# Altium PCB NUC977 DEV BOARD.PcbDoc (part 4 of 5)
Units mil, origin at the board's own origin, x right, y up, seen from the top; angles counter-clockwise.
Board outline 9012.5 x 7677.17 mil, 4 copper layers (Top, 2-GND, 3-POWER, Bottom), stack 35.4 mil thick; 487 components, 451 nets, 1969 pads, 1529 vias.
Unrouted connection lines stored in the file: 1.
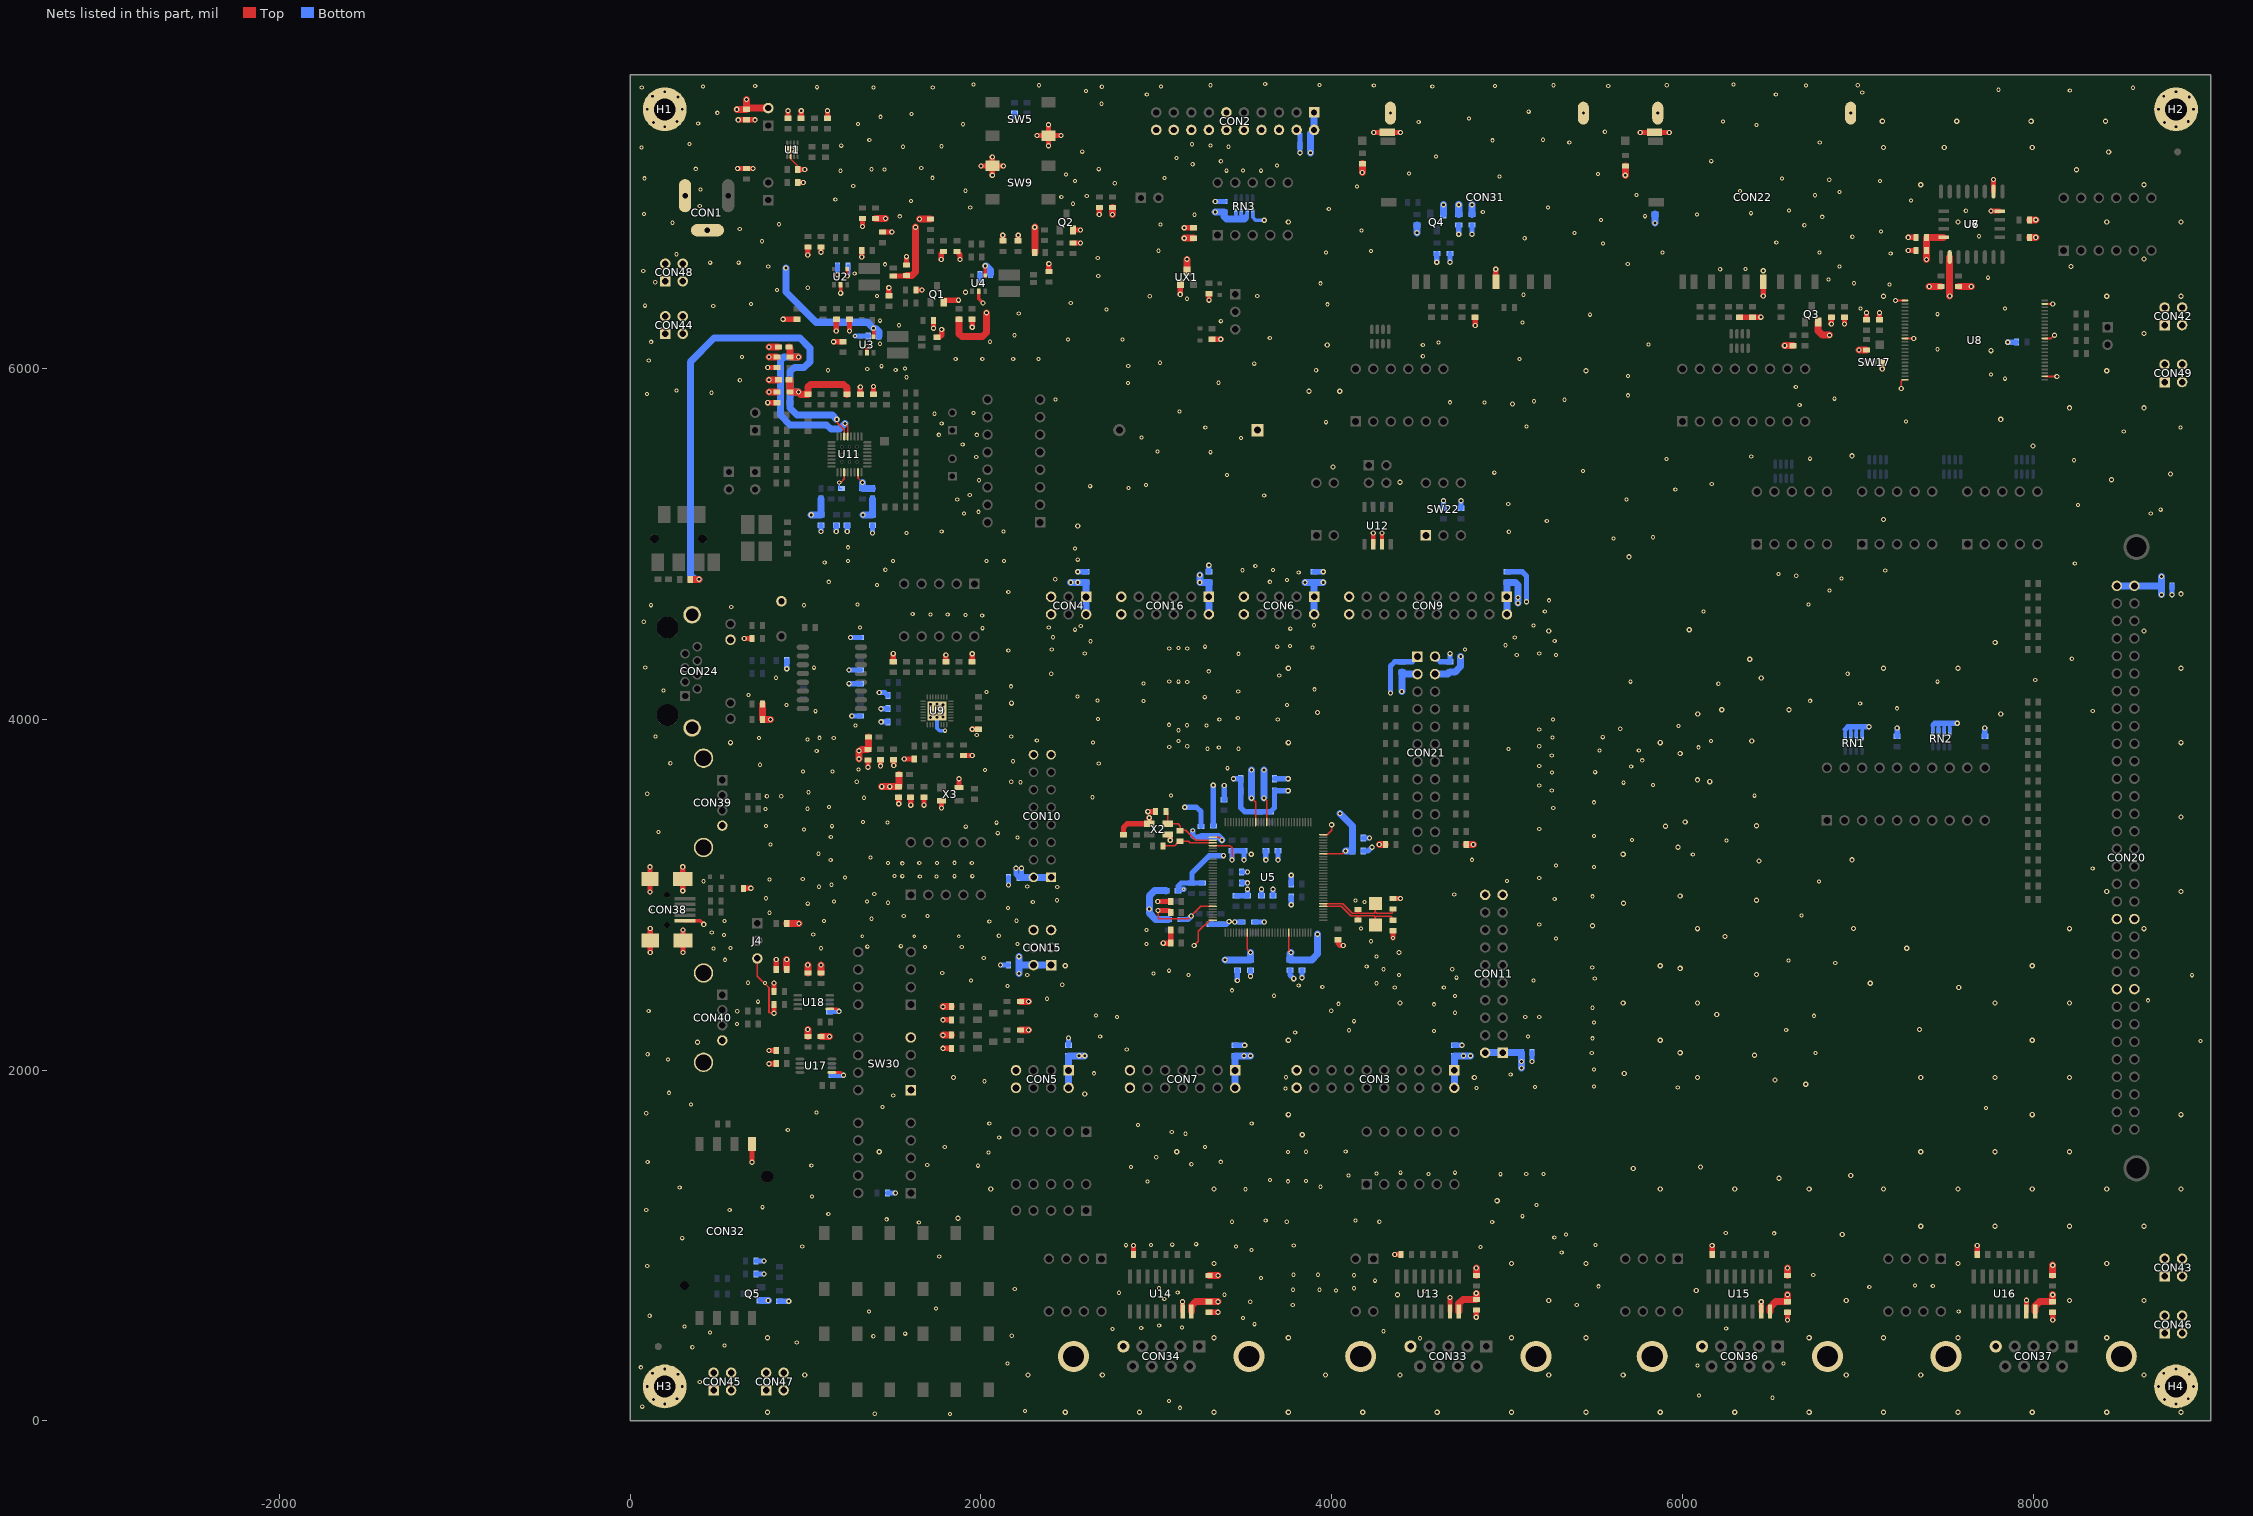
[diagram p6: the nets of this part, all layers, seen from the top]

## Via types
v1: diameter 24, hole 12, Top to Bottom, 897 vias
v2: diameter 30, hole 16, Top to Bottom, 628 vias
v3: diameter 20, hole 10, Top to Bottom, 4 vias

## Nets (pads, with @x,y where several pads share a name; then routed paths per layer and width w, separated by ;. In a path a pad name is that pad's centre, name@x,y a point inside that pad or via, vN(x,y) a via of type N, cw(c..) or ccw(c..) an arc to the next point about the centre after c; other vN are vias at no path point) (continued)
VD33: C42.2 C43.1 C47.2 C48.1 C52.2 C53.1 C57.2 C58.1 CB8.1 CB9.1 CB10.1 CB11.1 CB12.1 CB13.1 CB25.1 CB31.2 CB32.2 CON2.1 CON2.2 CON3.1 CON3.2 CON4.1 CON4.2 CON5.1 CON5.2 CON6.1 CON6.2 CON7.1 CON7.2 CON9.1 CON9.2 CON10.1 CON10.2 CON11.1 CON11.2 CON15.1 CON15.2 CON16.1 CON16.2 CON20.1 CON20.2 CON21.3 CON21.4 CON42.1 CON42.2 CON42.3 CON42.4 CON43.1 CON43.2 CON43.3 CON43.4 CON44.1 CON44.2 CON44.3 CON44.4 CON45.1 CON45.2 CON45.3 CON45.4 CT6.1 CT18.2 CT19.2 CT20.1 CT21.1 CT22.1 CT23.1 CT24.1 CT25.1 CT45.2 CT46.2 CT47.2 CT48.2 CT49.2 CT50.2 CT51.2 CT52.2 CT53.2 CT56.2 CT60.2 CT62.2 CT63.2 CT64.1 CT67.1 CT69.1 CT74.2 CT76.2 CT78.2 CT82.2 CT90.2 L6.1 L7.1 L8.2 L9.2 L12.2 L14.2 Q3.S Q4.S Q5.S R6.2 R7.2 R8.2 R21.1 R28.1 R33.2 R34.2 R38.2 R39.2 R40.2 R41.1 R43.2 R46.2 R63.1 R69.1 R98.2 R109.2 R110.2 R115.2 R116.2 R117.2 R118.2 R119.1 R120.1 R121.2 R124.2 R129.2 R130.2 R131.2 RN3.1 RN3.3 RN3.5 RV1.1 SW1.2 U5.9 U5.24 U5.57 U5.81 U5.85 U5.98 U6.8 U7.2 U12.3 U13.16 U14.16 U15.16 U16.16 | length 11454.4
  Top w8: U5.98@3322.54,3328.35 3359.15,3328.35 v2(3375,3312.5) ; U5.9@3519.39,2785.04 3519.39,2690.11 v2(3537.5,2672) ; v2(3542.5,3552) 3566.63,3527.87 U5.85@3566.63,3414.96 ; v2(3613.75,3552) 3629.63,3536.12 U5.81@3629.63,3414.96 ; U5.24@3755.61,2785.04 3755.61,2684.39 v2(3768,2672) ; U5.57@3952.46,3233.86 4063.86,3233.86 v2(4080,3250)
  Top w25: U12.3@4287.5,5000 v2(4287.5,5064)
  Top w30: SW1.2@1500,6530 1572.5,6530 CT6.1@1575,6532.5
  Top w40: R63.1@755,4087.5 R69.1@755,4000 v2(800,4000) ; v2(792,5867.5) CT76.2@837.5,5867.5 ; v2(792,5937.5) L9.2@845,5937.5 ; v2(792,6067.5) CT90.2@837.5,6067.5 ; v2(792,6125) L14.2@845,6125 ; CT82.2@892.5,2575 v2(892.5,2632) ; R131.2@892.5,2837.5 v2(962.5,2837.5) ; R129.2@1012.5,2192.5 v2(1012.5,2232) ; R130.2@1012.5,2555 v2(1012.5,2600) ; R110.2@1087.5,2192.5 v2(1136,2192.5) ; R109.2@1087.5,2555 v2(1087.5,2600) ; v2(1304,3776) v2@1304,3816 ; v2(1304,3822) v2@1304,3816 ; L7.1@1360,3901 1360,3833.75 CT69.1@1356.25,3830 1318,3830 v2@1304,3816 ; R8.2@1400,6857.5 v2(1456,6857.5) ; v2(1434,3617.5) v2(1480,3617.5) CT67.1@1531.25,3617.5 1532,3618.25 L6.1@1532,3687 ; CT6.1@1575,6532.5 1608,6532.5 1627.5,6552 v2(1627.5,6808) ; v2(1650,6855) R6.2@1712.5,6855 ; v2(1784,2200) R116.2@1832.5,2200 ; v2(1784,2362.5) R118.2@1832.5,2362.5 ; R21.1@1875,6282.5 1875,6200 1891,6184 2008,6184 2032,6208 v2(2032,6320) ; R115.2@2225,2230 v2(2272,2230) ; R117.2@2225,2392.5 v2(2272,2392.5) ; R7.2@2307.5,6662.5 v2(2307.5,6808) ; v2(2750,6880) R28.1@2750,6920 ; U14.16@3200,625 3200,656 3224,680 C48.1@3300,680 v2(3352,680) ; C47.2@3300,830 v2(3352,830) ; v2(4175,7120) R124.2@4175,7170 ; v2(4272,3287.5) R119.1@4307.5,3287.5 ; U13.16@4725,625 4725,669 4748.5,692.5 C43.1@4825,692.5 v2(4825,728) ; R120.1@4767.5,3287.5 v2(4808,3287.5) ; C42.2@4825,830 v2(4825,872) ; v2(5675,7104) R121.2@5675,7157.5 ; U15.16@6500,625 6500,648 6532,680 C53.1@6600,680 v2(6600,720) ; v2(6584,6132.5) R43.2@6631.25,6132.5 ; C52.2@6600,830 v2(6600,872) ; Q3.S@6774.9,6267.22 6774.9,6216 6798.9,6192 v2(6840,6192) ; v2(7008,6107.5) RV1.1@7050,6107.5 ; v2(7392.5,6624) CT64.1@7392.5,6675 CB25.1@7392.5,6750 U6.8@7490.5,6750 ; v2(7408,6470) R40.2@7475,6470 ; v2(7525,6416) U7.2@7525,6637.5 ; R41.1@7575,6470 v2(7648,6470) ; R39.2@7980,6750 v2(8016,6750) ; R38.2@7980,6850 v2(8016,6850) ; U16.16@8012.5,625 8012.5,656 8036.5,680 C58.1@8112.5,680 v2(8112.5,720) ; C57.2@8112.5,830 v2(8112.5,888)
  Bottom w20: 3454,6856 RN3.1@3454,6887.5 ; 3486,6856 RN3.3@3486,6887.5 ; 3510,6864 3518,6872 RN3.5@3518,6887.5
  Bottom w30: v2(2200,3152) 2200,3117.5 CT50.2@2217.5,3100 2232,3100 v2(2232,3152) ; v1(3208,3368) 3208,3338 3216,3330 CT25.1@3255,3330
  Bottom w40: Q5.S@745.28,687.6 v2(787.5,687.6) ; v2(1032,5167.5) CT74.2@1087.5,5167.5 L8.2@1087.5,5257.5 ; v2(1328,5167.5) CT78.2@1381.25,5167.5 L12.2@1381.25,5257.5 ; v2(2217.5,2552) CT52.2@2217.5,2600 ; v2(2217.5,2648) CT52.2@2217.5,2600 ; CT50.2@2232,3100 CON10.2@2300,3100 CON10.1@2400,3100 ; CON15.1@2400,2600 CON15.2@2300,2600 CT52.2@2217.5,2600 ; CON5.2@2500,1900 CON5.1@2500,2000 CT47.2@2500,2082.5 v2(2560,2082.5) v2(2592,2082.5) ; v2(2512,4782.5) v2(2552,4782.5) CT46.2@2600,4782.5 CON4.1@2600,4700 CON4.2@2600,4600 ; R33.2@3056.25,3023.75 3051.07,3023.87 2989.87,3023.87 2960,2993 v2(2960,2920) 2960,2896 2996,2860 R34.2@3070,2860 ; v2(3248,4824) v2(3248,4782.5) CT53.2@3300,4782.5 CON16.1@3300,4700 CON16.2@3300,4600 ; CT25.1@3255,3330 3257.5,3332.5 CB13.1@3325,3332.5 3355,3332.5 v2(3375,3312.5) ; v2(3336,6895) CT18.2@3387.5,6895 3387.5,6868.5 3400,6856 3454,6856 3486,6856 3502,6856 3510,6864 ; v2(3392,2630) CT20.1@3462.5,2630 CB8.1@3537.5,2630 v2(3537.5,2672) ; CON7.2@3450,1900 CON7.1@3450,2000 CT56.2@3450,2082.5 v2(3500,2082.5) v2(3537.5,2082.5) ; v2(3542.5,3552) CB12.1@3542.5,3593.75 CT24.1@3542.5,3662.5 v2(3542.5,3712) ; v2(3613.75,3552) CB11.1@3613.75,3593.75 CT23.1@3613.75,3662.5 v2(3613.75,3712) ; v2(3768,2672) 3762.5,2666.5 CB9.1@3762.5,2630 CT21.1@3831.25,2630 3888,2630 3920,2662 v2(3920,2776) ; v2(3848,4782.5) CT48.2@3900,4782.5 ; v2(3880,7232) CT19.2@3880,7275 3880,7342.5 CON2.2@3900,7362.5 CON2.1@3900,7462.5 ; CON6.2@3900,4600 CON6.1@3900,4700 CT48.2@3900,4782.5 ; v2(3952,4782.5) CT48.2@3900,4782.5 ; v2(4048,3464) 4120,3392 CT22.1@4120,3325 CB10.1@4120,3250 v2(4080,3250) ; v2(4400,4160) CT62.2@4400,4270 4410.45,4259.55 CON21.3@4489.57,4259.55 ; v2(4487.5,6776) R98.2@4487.5,6820 ; CON21.4@4589.57,4259.55 4664.55,4259.55 CT63.2@4675,4270 4704,4270 4736,4302 v2(4736,4360) ; Q4.S@4637.4,6882.78 v2(4637.4,6936) ; CON3.2@4700,1900 CON3.1@4700,2000 CT45.2@4700,2082.5 v2(4752,2082.5) v2(4792,2082.5) ; CB31.2@4725,6880 v2(4725,6936) ; CB32.2@4800,6880 v2(4800,6936) ; CON11.2@4875,2100 CON11.1@4975,2100 CT51.2@5082.5,2100 v2(5082.5,2050) v2(5082.5,2012.5) ; CON9.2@5000,4600 CON9.1@5000,4700 CT49.2@5000,4782.5 5048,4782.5 5062.5,4768 v2(5062.5,4696) v2(5062.5,4664) ; v2(5843.75,6832) R46.2@5843.75,6882.5 ; CON20.1@8478.15,4762.6 CON20.2@8578.15,4762.6 8732.4,4762.6 CT60.2@8732.5,4762.5 ; v2(8732.5,4712) CT60.2@8732.5,4762.5 ; v2(8732.5,4816) CT60.2@8732.5,4762.5
VDDA: CT77.2 L12.1 U11.31 | length 159.6
  Top w10: U11.31@1299.21,5410.14 1299.21,5377.79 v2(1325,5352)
  Bottom w40: v2(1325,5352) CT77.2@1325,5317.5 L12.1@1381.25,5317.5
VDDB: CT75.2 L9.1 R91.2 RX3.1 RX4.1 U11.14 | length 3459.6
  Top w8: v2(1177.47,5712) 1177.47,5694.53 1220.47,5651.53 U11.14@1220.47,5614.86
  Top w40: R91.2@342.5,4800 v2(392,4800) ; L9.1@905,5937.5 912.5,5937.5 CT75.2@912.5,5867.5 v2(960,5867.5) 972.5,5855 RX3.1@1012.5,5855 1012.5,5896 1028.5,5912 1216,5912 1237.5,5890.5 RX4.1@1237.5,5855
  Bottom w40: v2(392,4800) 368,4800 342.5,4825.5 342.5,6040 478.5,6176 968,6176 1024,6120 1024,6040 992,6008 936,6008 912,5984 912,5887 931.5,5867.5 ; v2(960,5867.5) 931.5,5867.5 ; v2(1177.47,5712) 1153.47,5736 952,5736 912,5776 912,5848 931.5,5867.5
VDDC: CT79.2 L14.1 U11.13 | length 1026.5
  Top w8: v2(1224.16,5688) 1240.16,5672 U11.13@1240.16,5614.86
  Top w40: L14.1@905,6125 912,6118 912,6068 CT79.2@912.5,6067.5 v2(960,6067.5)
  Bottom w40: v2(960,6067.5) 875.5,6067.5 856,6048 856,5736 912,5680 1120,5680 1144,5656 1192.16,5656 v2(1224.16,5688)
VIN: C64.1 CT1.1 CT5.1 CT9.1 CT13.1 J2.2 U2.4 U3.4 U4.4 UX1.3 | length 1420.5
  Top w20: v2(1237.4,6529) U2.4@1237.4,6570.03 ; U3.4@1387.4,6182.53 1387.5,6182.53 v2(1387.5,6231.25) ; U4.4@2024.9,6532.53 2025,6532.53 v2(2025,6587.5)
  Top w40: v2(608,7480) CT1.1@662.5,7480 ; v2(662.5,7536) CT1.1@662.5,7480 ; J2.2@787.5,7487.5 667.5,7487.5 CT1.1@662.5,7480 ; v2(3160,6745) C64.1@3212.5,6745 ; UX1.3@3175,6557.5 v2(3175,6625)
  Bottom w20: v2(1237.4,6529) 1246,6537.6 1246,6584 CT13.1@1242.5,6587.5
  Bottom w40: v2(887.5,6575) 887.5,6437.5 1059.1,6265.9 1352.85,6265.9 v2(1387.5,6231.25) 1400,6231.25 1417.5,6213.75 CT9.1@1417.5,6187.5 ; v2(2025,6587.5) 2031.25,6587.5 2055,6563.75 CT5.1@2055,6537.5
VREF: C28.2 U11.27 | length 123.4
  Top w8: v1(1192,5352) 1200,5352 1220.47,5372.47 U11.27@1220.47,5410.14
  Bottom w8: v1(1192,5352) 1192,5317.5 C28.2@1206.25,5317.5
VS: BT1.1 C1.2 C2.2 C3.2 C4.2 C5.2 C7.2 C8.1 C10.2 C11.2 C12.2 C13.2 C15.2 C16.1 C17.2 C18.2 C19.2 C20.2 C21.2 C22.2 C23.2 C24.2 C25.2 C26.2 C41.2 C43.2 C46.1 C48.2 C51.1 C53.2 C56.1 C58.2 C61.1 C64.2 CB1.2 CB2.2 CB3.2 CB4.2 CB5.2 CB6.2 CB7.2 CB8.2 CB9.2 CB10.2 CB11.2 CB12.2 CB13.2 CB16.2 CB17.2 CB18.2 CB19.2 CB20.2 CB21.2 CB25.2 CB26.2 CB27.2 CB28.1 CB29.1 CB31.1 CB32.1 CB33.1 CB34.1 CM1.2 CM4.2 CON1.2 CON1.3 CON2.4 CON2.6 CON2.8 CON2.10 CON2.11 CON2.12 CON2.14 CON2.16 CON2.18 CON2.20 CON3.19 CON3.20 CON4.5 CON4.6 CON5.7 CON5.8 CON6.9 CON6.10 CON7.13 CON7.14 CON9.19 CON9.20 CON10.15 CON10.16 CON11.19 CON11.20 CON15.5 CON15.6 CON16.11 CON16.12 CON20.39 CON20.40 CON20.47 CON20.48 CON21.1 CON21.2 CON22.3 CON22.12 CON22.13 CON22.14 CON24.11 CON24.13 CON24.14 CON31.3 CON31.12 CON31.13 CON31.14 CON32.5 CON33.5 CON33.10 CON33.11 CON34.5 CON34.10 CON34.11 CON36.5 CON36.10 CON36.11 CON37.5 CON37.10 CON37.11 CON38.5 CON38.6 CON38.7 CON38.8 CON38.9 CON39.4 CON39.5 CON39.6 CON40.4 CON40.5 CON40.6 CON46.1 CON46.2 CON46.3 CON46.4 CON47.1 CON47.2 CON47.3 CON47.4 CON48.1 CON48.2 CON48.3 CON48.4 CON49.1 CON49.2 CON49.3 CON49.4 CT1.2 CT2.1 CT3.2 CT4.2 CT5.2 CT6.2 CT7.2 CT8.2 CT9.2 CT10.2 CT11.2 CT12.2 CT13.2 CT14.2 CT15.2 CT16.2 CT18.1 CT19.1 CT20.2 CT21.2 CT22.2 CT23.2 CT24.2 CT25.2 CT30.2 CT31.2 CT32.2 CT33.2 CT34.2 CT35.2 CT37.2 CT38.2 CT40.2 CT41.2 CT43.2 CT44.2 CT45.1 CT46.1 CT47.1 CT48.1 CT49.1 CT50.1 CT51.1 CT52.1 CT53.1 CT56.1 CT60.1 CT62.1 CT63.1 CT64.2 CT65.1 CT66.1 CT67.2 CT68.2 CT69.2 CT70.2 CT71.2 CT74.1 CT76.1 CT78.1 CT80.1 CT81.1 CT82.1 CT83.1 CT84.1 CT85.1 CT86.1 CT87.1 CT88.1 CT89.1 CT90.1 CX1.2 H1.1 H1.2 H1.3 H1.4 H1.5 H1.6 H1.7 H1.8 H1.9 H2.1 H2.2 H2.3 H2.4 H2.5 H2.6 H2.7 H2.8 H2.9 H3.1 H3.2 H3.3 H3.4 H3.5 H3.6 H3.7 H3.8 H3.9 H4.1 H4.2 H4.3 H4.4 H4.5 H4.6 H4.7 H4.8 H4.9 J4.3 LED2.2 LED9.2 LED10.2 Q1.E Q2.E R1.1 R2.1 R5.2 R16.1 R19.1 R23.1 R24.2 R25.2 R26.2 R27.2 R42.1 R53.1 R56.1 R58.1 R60.1 R62.1 R71.2 R87.2 R89.2 R92.2 R94.2 R95.1 R96.1 R97.1 R108.2 R113.1 RG1.1 RN1.2 RN1.4 RN1.6 RN1.8 RN2.2 RN2.4 RN2.6 RN2.8 RN3.7 SW5.4 SW9.4 SW17.3 SW22.1 SW30.1 SW30.4 U1.2 U1.9 U2.2 U3.2 U4.2 U5.64 U5.101 U5.123 U5.128 U6.4 U7.10 U8.2 U8.13 U8.23 U8.25 U8.36 U8.48 U9.33 U12.2 U13.15 U14.15 U15.15 U16.15 U17.1 U18.1 UX1.1 X2.2 X2.4 X3.2 X3.4 | length 15711.7
  Top w5: v2(1749.5,4049.5) 1749.5,4047.25 U9.33@1792.75,4004
  Top w8: v2(3010,2911) 3010,2864 3184,2864 v2(3200,2880) 3254.65,2934.65 U5.123@3322.54,2934.65 ; v2(3216,2712) 3240,2736 3240,2792 3303.91,2855.91 U5.128@3322.54,2855.91 ; U5.101@3322.54,3281.1 3419.5,3281.1 3432,3268.6 v2(3432,3200) ; U5.64@3952.46,3344.09 3976.09,3344.09 4000,3368 v2(4000,3400)
  Top w10: J4.3@725,2637.5 725,2536 792,2469 792,2328 v2@820,2328 ; U1.9@915.16,7240.16 U1.2@915.16,7210.63 915.16,7196.84 955,7157 CT2.1@955,7137.5 ; v2(7216,6390.26) U8.25@7269.88,6390.26 ; v2(7248,5888) 7248,5929.5 7256,5937.5 U8.48@7269.88,5937.5 ; U8.36@7269.88,6173.72 v2(7320,6173.72) ; U8.2@8067.13,5957.18 v2(8136,5957.18) ; U8.13@8067.13,6173.72 8104,6173.72 v2(8122.28,6192) ; U8.23@8067.13,6370.57 v2(8112.5,6370.57)
  Top w12: U1.9@915.16,7240.16 v1(925,7250)
  Top w15: U18.1@1137.5,2350 1176,2350 v2(1190,2336) ; U17.1@1150,1987.5 1200,1987.5 v2(1216,1971.5)
  Top w20: CON38.5@312.2,2851.81 400,2851.81 v2(419.81,2832) ; v2(1200,6432) U2.2@1200,6479.97 ; U3.2@1350,6092.47 v2(1350,6128) ; U4.2@1987.5,6442.47 1987.5,6400 v2(2012.5,6375)
  Top w25: U12.2@4237.5,5000 v2(4237.5,5064)
  Top w30: v2(113.39,3016) CON38.8@113.39,3090 v2(113.39,3160) ; v2(114.17,2672) CON38.6@114.17,2739.61 v2(114.17,2808) ; v2(300,3024) CON38.9@300,3090 v2(300,3160) ; v2(300.39,2672) CON38.7@300.39,2740 v2(300.39,2800) ; v2(612.5,7142.5) C1.2@662.5,7142.5 v2(700,7142.5) ; v2(616,7420) CT1.2@662.5,7420 v2(712,7420) ; R113.1@645.5,3037.5 v2(688,3037.5) ; v2(650,4462.5) R71.2@695,4462.5 ; v2(695,1475.5) CON32.5@695,1579.5 ; v2(784,5807.5) CT76.1@837.5,5807.5 ; v2(784,6007.5) CT90.1@837.5,6007.5 ; v2(792,2037.5) CT85.1@832.5,2037.5 ; v2(792,2112.5) CT87.1@832.5,2112.5 ; v2(820,2325) 820,2328 CT86.1@820,2375 ; CT88.1@820,2450 v2(820,2497.5) ; CT82.1@832.5,2575 v2(832.5,2632) ; v2(872,6282.5) C7.2@950,6282.5 ; CB1.2@900,7430 v2(900,7472) ; R2.1@955,7062.5 v2(987,7062.5) ; CT2.1@955,7137.5 v2(995,7137.5) ; R1.1@975,7430 v2(975,7472) ; v2(1012.5,6649) R16.1@1012.5,6695 ; v2(1087.5,6665) C8.1@1087.5,6695 ; R5.2@1125,7430 v2(1125,7472) ; v2(1160,6155) C10.2@1212.5,6155 ; v2(1175,6216) C11.2@1175,6282.5 ; v2(1250,6216) R19.1@1250,6282.5 ; R89.2@1312.5,5855 v2(1312.5,5896) ; v2(1320,6637.5) CT7.2@1320,6675 ; v2(1325,6812.5) LED2.2@1325,6857.5 ; v2(1356.25,3728) CT69.2@1356.25,3770 ; R87.2@1387.5,5855 v2(1387.5,5900) ; v2(1427.5,3736) CB28.1@1427.5,3771 ; CT8.2@1437.5,6780 v2(1492,6780) ; CT10.2@1475,6417.5 v2(1475,6462.5) ; R56.1@1500,4330 v2(1500,4376) ; v2(1502.5,3737.5) CT70.2@1502.5,3771 ; v2(1531.25,3520) CT67.2@1531.25,3557.5 ; v2(1562.5,3775) C24.2@1620,3775 ; CT6.2@1575,6592.5 v2(1575,6640) ; CT68.2@1599.5,3557 1600,3557 v2(1600,3512) ; CT3.2@1630,6450 v2(1664,6450) ; C23.2@1674.5,3557 1675,3557 v2(1675,3512) ; v2(1730,6232) CT12.2@1730,6275 ; CT11.2@1750,6180 1763.5,6180 1776,6192.5 v2(1776,6225) ; v2(1773.5,6624) 1773.5,6656 C15.2@1787.5,6670 ; v2(1775,3496) X3.2@1775,3537.7 ; v2(1784,2125) LED9.2@1832.5,2125 ; v2(1784,2287.5) LED10.2@1832.5,2287.5 ; Q1.E@1787.4,6379.72 1787.4,6392 v2(1872,6392) ; R60.1@1800,4330 v2(1800,4368) ; R23.1@1862.5,6670 1880,6652.5 v2(1880,6624) ; X3.4@1875,3612.5 v2(1875,3662.5) ; R58.1@1900,3795 v2(1950,3795) ; v2(1950,3945) C18.2@1987.5,3945 ; R62.1@1950,4330 v2(1950,4375) ; v2(1950,6237.5) C13.2@1950,6282.5 ; v2(2000,7157.19) SW9.4@2065.16,7157.19 ; v2(2065.16,7104) SW9.4@2065.16,7157.19 ; v2(2065.16,7208) SW9.4@2065.16,7157.19 ; CT14.2@2125,6730 v2(2125,6762.5) ; v2(2128,7157.19) SW9.4@2065.16,7157.19 ; CT16.2@2212.5,6730 v2(2212.5,6762.5) ; v2(2320,7330.31) SW5.4@2384.84,7330.31 ; v2(2384.84,7272) SW5.4@2384.84,7330.31 ; v2(2384.84,7392) SW5.4@2384.84,7330.31 ; CT15.2@2387.5,6555 v2(2387.5,6600) ; v2(2456,7330.31) SW5.4@2384.84,7330.31 ; Q2.E@2524.9,6792.22 v2(2568,6792.22) ; CT4.2@2525,6717.5 v2(2568,6717.5) ; v2(2675,6880) C16.1@2675,6920 ; C5.2@2812.5,3342.5 2812.5,3384 2834.01,3405.51 X2.2@2960.33,3405.51 v2(2960.33,3440) ; C51.1@2870,950 v2(2870,1000) ; v2(2952,3475) C4.2@2995,3475 ; v2(3008,2962) 3082.5,2962 CB3.2@3082.5,2962.5 ; v2(3010,2911) 3072,2911 R24.2@3082.5,2900 ; v2(3040,2725) R25.2@3082.5,2725 CB4.2@3082.5,2800 ; X2.4@3064.67,3344.49 3080,3329.14 v2(3080,3312) ; v2(3137,6425) UX1.1@3137,6487.5 ; U14.15@3150,625 v2(3150,680) ; v2(3160,6805) C64.2@3212.5,6805 ; C48.2@3300,620 v2(3352,620) ; v2(3300.5,6392) CX1.2@3300.5,6428.5 ; CB2.2@3317,6169.5 v2(3368,6169.5) ; CB7.2@4037.5,2745 4037.5,2722.5 4048,2712 v2(4066,2712) ; v2(4240,7348.52) CON31.12@4317.22,7348.52 v2(4392,7348.52) ; v1(4350,2755) C2.2@4350,2795 ; C3.2@4350,2980 v2(4392,2980) ; v2(4360,950) C46.1@4395,950 ; U13.15@4675,625 v2(4675,704) ; v2(4818.75,6248) C41.2@4818.75,6295 ; v2(4825,592) C43.2@4825,632.5 ; CON31.3@4936.32,6496.16 v2(4936.32,6568) ; v2(5760,7348.52) CON22.12@5842.22,7348.52 v2(5925,7348.52) ; C56.1@6170,950 v2(6170,1000) ; C17.2@6325,6295 CT66.1@6400,6295 v2(6448,6295) ; U15.15@6450,625 v2(6450,680) ; v2(6461.32,6416) CON22.3@6461.32,6496.16 ; v2(6600,576) C53.2@6600,620 ; v2(6850,6256) CT65.1@6850,6295 ; v2(6925,6256) R42.1@6925,6295 ; CT89.1@7050,6280 v2(7050,6320) ; CB27.2@7125,6280 v2(7125,6320) ; v2(7140,6000) SW17.3@7140,6037.5 ; v2(7288,6675) CT64.2@7332.5,6675 ; v2(7288,6750) CB25.2@7332.5,6750 ; C61.1@7682.5,950 v2(7682.5,1000) ; v2(7760,6900) U6.4@7809.5,6900 ; U7.10@7775,7011.52 v2(7775,7080) ; U16.15@7962.5,625 v2(7962.5,688) ; v2(8112.5,576) C58.2@8112.5,620
  Bottom w20: v2(1749.5,4049.5) v2(1749.5,4013.75) 1749.5,3951.16 1763.97,3936.69 v1(1795.3,3936.69) ; RN3.7@3550,6887.5 3550,6864 3566,6848 v2(3616,6848) ; RN1.2@6929,3907 6929,3944 ; RN1.4@6961,3907 6961,3959 ; RN1.6@6993,3907 6993,3959 ; RN1.8@7025,3907 7025,3959 ; RN2.2@7429,3932 7429,3968 ; RN2.4@7461,3932 7461,3979 ; RN2.6@7493,3932 7493,3979 ; RN2.8@7525,3932 7525,3979
  Bottom w30: CT81.1@717.5,837.5 v2(762.5,837.5) ; CB33.1@717.5,912.5 v2(762.5,912.5) ; CB34.1@850,682.5 v2(904,682.5) ; v2(892.5,4290) C25.2@892.5,4337.5 ; v2(1087.5,5072) CT74.1@1087.5,5107.5 ; CT84.1@1137.5,2332.5 1141,2336 v2(1190,2336) ; CT83.1@1150,1970 1151.5,1971.5 v2(1216,1971.5) ; v2(1175,5072) R92.2@1175,5107.5 ; v2(1182.5,6537) CT13.2@1182.5,6587.5 ; v2(1237.5,5072) R94.2@1237.5,5107.5 ; v2(1248,4205) C19.2@1312.5,4205 ; v2(1248,4282.5) C22.2@1312.5,4282.5 ; v2(1256,4467.5) C21.2@1312.5,4467.5 ; v2(1264,4020) C20.2@1312.5,4020 ; v1(1281.25,6187.5) CT9.2@1357.5,6187.5 ; v2(1381.25,5064) CT78.1@1381.25,5107.5 ; v2(1420,4155) 1451.5,4155 R53.1@1469.5,4137 ; v2(1430,4062) CB29.1@1469.5,4062 ; v2(1431,3987) CT71.2@1469.5,3987 ; R108.2@1467.5,1300 v2(1512,1300) ; v2(1712,4012) v2(1749.5,4049.5) ; v2(1712,4049.5) v2(1749.5,4049.5) ; v2(1712,4087) v2(1749.5,4049.5) ; v2(1749.5,4088) v2(1749.5,4049.5) ; U9.33@1769.52,4049.5 v2(1784,4049.5) ; v2(1784,4015) v2(1749.5,4049.5) ; v2(1784,4084) v2(1749.5,4049.5) ; v2(1995,6487.5) CT5.2@1995,6537.5 ; v2(2112,2600) CT52.1@2157.5,2600 ; v2(2157.5,3056) CT50.1@2157.5,3100 ; v2(2192,7416) C12.2@2192,7458 ; CT47.1@2500,2142.5 v2(2500,2184) ; v2(2552,4842.5) CT46.1@2600,4842.5 ; CT41.2@3140,2860 3180,2860 v2(3200,2880) ; v3(3157,3033) 3137.5,3033 CT40.2@3125,3023.75 3125,3050 3142.5,3067.5 CT44.2@3200,3067.5 ; v2(3162.5,3500) 3230,3500 3255,3475 CT25.2@3255,3390 ; CB5.2@3262.5,3067.5 CT44.2@3200,3067.5 ; CT53.1@3300,4842.5 v2(3300,4880) ; CT43.2@3306.25,2832.5 CB6.2@3368.75,2832.5 3400,2832.5 v2(3415.5,2848) ; CB13.2@3325,3392.5 v2(3325,3625) ; v2(3336,6955) CT18.1@3387.5,6955 ; v2(3384,3224) 3302.5,3224 3203.91,3125.41 3203.91,3074.78 CT44.2@3200,3067.5 ; RG1.1@3387.5,3542.5 v2(3387.5,3624) ; CB20.2@3431.25,3251.25 CB20.2@3432,3251.25 ; v2(3432,3200) CB20.2@3432,3251.25 ; v2(3440,3662.5) CT24.2@3482.5,3662.5 CB12.2@3482.5,3593.75 3482.5,3496.5 3504,3475 CM4.2@3590,3475 3591.25,3473.75 CT38.2@3650,3473.75 3673.75,3497.5 CB11.2@3673.75,3593.75 v2(3752,3593.75) ; v2(3448,2845) CT37.2@3490,2845 ; CT56.1@3450,2142.5 v2(3504,2142.5) ; CT30.2@3455,2995 CB16.2@3520,2995 v2(3520,3032) ; v2(3462.5,2512) CT20.2@3462.5,2570 ; CB21.2@3486.25,3068.75 v2(3520,3068.75) ; CT35.2@3486.25,3131.25 v2(3520,3131.25) ; v2(3500,3200) CT34.2@3500,3251.25 CB20.2@3432,3251.25 ; v2(3537.5,2536) CB8.2@3537.5,2570 ; CM1.2@3560,2845 v2(3616,2845) ; CB17.2@3600,2995 v2(3600,3032) ; v2(3625,3200) CB19.2@3625,3251.25 ; CT31.2@3665,2995 v2(3665,3032) ; CT23.2@3673.75,3662.5 v2(3752,3662.5) ; v2(3693.75,3200) CT33.2@3693.75,3251.25 ; CB9.2@3762.5,2570 3762.5,2544 v2(3784,2522.5) ; v2(3770,2944) CB18.2@3770,2987.5 ; CT32.2@3770,3062.5 v2(3770,3112) ; CON2.4@3800,7362.5 3800,7357.5 3820,7337.5 CT19.1@3820,7275 v2(3820,7232) ; v2(3831.25,2528) CT21.2@3831.25,2570 ; CT48.1@3900,4842.5 v2(3952,4842.5) ; CB10.2@4180,3250 4208,3250 v2(4230,3272) ; CT22.2@4180,3325 v2(4216,3325) ; v2(4336,4152) 4336,4306 4360,4330 CT62.1@4400,4330 4460.02,4330 CON21.1@4489.57,4359.55 ; CON21.2@4589.57,4359.55 4619.12,4330 CT63.1@4675,4330 v2(4675,4376) ; v2(4600,6608) CT80.1@4600,6657.5 ; R95.1@4637.5,5205 v2(4637.5,5248) ; v2(4675,6608) R97.1@4675,6657.5 ; CT45.1@4700,2142.5 v2(4744,2142.5) ; v2(4725,6768) CB31.1@4725,6820 ; R96.1@4737.5,5205 v2(4737.5,5248) ; v2(4800,6768) CB32.1@4800,6820 ; CT49.1@5000,4842.5 5088,4842.5 5112,4818.5 v2(5112,4672) ; v2(5142.5,2050) CT51.1@5142.5,2100 ; 6929,3944 6944,3959 6961,3959 6993,3959 7025,3959 v2(7064,3959) ; R26.2@7225,3905 v2(7225,3952) ; 7429,3968 7440,3979 7461,3979 7493,3979 7525,3979 v2(7568,3979) ; R27.2@7725,3905 v2(7725,3952) ; v2(7856,6152) CB26.2@7906,6152 ; v2(8792.5,4712) CT60.1@8792.5,4762.5
  other v1: 1823.03,39.66 1394.28,41.07 2251.79,56.53 3134.61,74.81 68.78,81.53 3072.76,114.17 6514.88,132.18 6095.54,145.43 396.75,221.68 60.37,305.78 6086.85,316.16 6576.82,327.19 2151.55,327.8 6329.63,360.3 354.1,420.17 538.19,431 949.76,446.94 4504,472 1386.51,483.04 2175.99,486.21 1567.85,497.81 455.61,504.8 4295.37,511.89 2750,525 6250.17,528.03 2913.9,530.27 3147.26,533.09 309,539.05 3016.52,544.33 3560,552 3494.48,586.5 110.83,600.11 7576,624 1362.5,625 1743.86,641.86 3778.45,661.01 5398.12,661.87 3536,680 3046.05,694.75 3389.05,720.05 7870,730.29 2787.5,731.25 3121.96,732.7 4528.54,741.33 4024.46,743.95 3779.85,748.17 3930.27,748.17 2192.99,752.56 3015.12,756.6 4127.08,756.6 7066.64,763.4 5521.71,767.81 7428.6,770.02 7327.07,772.23 4248,800 3596.51,815.3 4127.08,831.11 6746.62,831.82 3782.66,833.92 3921.83,833.92 96.81,883.23 1762.5,937.5 5312,960 3543.69,974.49 4849.24,992.66 3455.12,994.18 980.95,995.56 3784,1000 2826.75,1002.61 2970.13,1004.02 5504.05,1003.97 3091.03,1005.42 3227.39,1008.23 296.43,1042.52 5270.11,1045.9 5336,1064 6523.71,1070.18 6247.83,1072.39 1645.91,1131.94 4915.71,1134.75 3432,1136 3744,1136 4272,1136 3624,1144 4136,1144 1462.5,1150 5088,1168 1129.7,1180.22 91.21,1202.78 567.06,1203.44 754.84,1219.39 5168,1232 1036.39,1279.61 3508.54,1321.72 281.99,1331.28 3936,1336 2950.45,1365.3 3751.74,1366.7 3854.36,1368.11 3649.12,1373.73 4096,1400 4963.5,1407.47 4552,1408 5208,1408 5109.7,1408.87 4256.41,1411.69 4392,1416 4704,1416 2856,1448 1032.7,1456.11 1984,1456 1693.7,1459.48 3200,1464 99.61,1477.49 3367.97,1477.76 3000,1504 2043.75,1531.25 3751.74,1533.99 3854.36,1535.39 4080,1536 1793.75,1562.5 3278,1562.1 2104,1616 3166.94,1638.01 3088.22,1647.85 898.88,1658.89 2896,1688 2048,1696 3544,1696 91.21,1755 1063.02,1759.83 7732.22,1784.14 1439.26,1789.84 347.38,1804.75 1500,1856.25 220.55,1871.21 3737.68,1896.67 4825.74,1898.08 5974.15,1902.23 5160,1904 5496.29,1907.92 2021.21,1937.23 3739.09,1959.93 5021.14,1975.4 2644.58,1982.56 5496.29,2004.92 215.93,2060.98 99.61,2091.38 5483.63,2099.1 6759.36,2099.07 2831.59,2118.57 8955.87,2167.08 5487.85,2182.04 2680,2192 5120,2192 3792,2216 4584,2224 4098.96,2228.43 6592.28,2229.64 609.62,2264.37 5496,2272 4128,2280 2776,2304 5104,2304 5184,2304 6750.16,2310.58 2656,2312 4704,2328 610.21,2336.85 105.22,2338.06 3997.75,2339.49 5487.85,2356.36 4584,2376 4039.92,2378.85 728.7,2391.17 8655.62,2398.86 2376,2408 4704,2424 3671.61,2425.24 3432,2456 4360,2472 4640,2472 3947.14,2474.44 2152,2480 3812.19,2482.88 2464,2488 4256,2496 769.12,2497.98 671.8,2499.37 1944,2512 5152,2512 5500.5,2523.64 4712,2528 8907.32,2542.28 2264,2544 3184,2544 4384,2544 2984,2552 1779.46,2554.57 3072,2568 4296,2576 4688,2576 5486.45,2586.9 4200,2592 6872.01,2611.76 6605.32,2625.55 540.29,2629.95 2016,2640 4256,2648 474.38,2693.85 1088,2696 572.31,2696.65 1681.05,2702.17 1890.51,2702.17 1352.1,2704.99 1543.29,2707.8 2208,2720 2944,2720 4224,2736 5280,2752 2102.22,2767.07 535,2771.26 1043.71,2774.37 464.74,2785.71 2944,2800 4168,2808 5184,2832 2048,2848 536.84,2851.51 1104.23,2851.51 2202.95,2852.88 1376,2864 1560,2880 1696,2880 6678.89,2883.05 793.63,2898.14 112.5,2913.54 2153.84,2925.02 1012.5,2950 1470.33,2955.44 4187.52,2959.43 2296,2960 1162.5,2962.5 1350,2962.5 4136,2968 2433.66,2969.79 5272,2976 775,2981.25 5488,2992 4699.22,3001.6 1391.47,3005.82 2435.08,3044.82 1076.36,3046.47 2264,3048 1147.06,3057.76 6780.05,3076.17 417.45,3078.16 5000,3080 793.75,3087.5 983.79,3091.57 5184,3096 1225.59,3100 1651.53,3104.22 1747.12,3105.63 1551.72,3107.03 1849.74,3107.03 1950.96,3107.03 1506.74,3108.44 8340.11,3151.42 5496,3160 5280,3168 1551.72,3180.13 1470.19,3181.54 1648.72,3181.54 1749.93,3181.54 1948.15,3181.54 1849.74,3182.94 1143.24,3199.83 4800,3200 1369.44,3212.64 6060,3230 1073.85,3234.84 800,3287.5 6252,3310 5712.5,3312.5 2208,3328 1144,3330.82 5496,3336 2096,3352 161.28,3358.4 991.01,3372.42 5184,3376 1913.25,3389.24 1150.79,3392.04 775,3393.75 2088.72,3412.08 1467.38,3413.49 1328,3416 770.88,3490.77 1010.59,3491.7 5264,3496 1133.98,3501.36 5496,3528 1333.83,3554.07 2635.56,3556.88 778.97,3562.57 861.36,3562.59 6412,3566 3084,3566.72 96.81,3577.05 1016.24,3585.46 5255.51,3594.72 5184,3624 5833.28,3627.05 5664,3640 2225.08,3642.63 1291.66,3645.44 2173.07,3645.44 5256.91,3697.34 5502.92,3700.15 985.41,3703.19 1153.6,3703.19 2024,3712 1301.5,3715.73 3405.92,3722.76 5708.16,3732.49 5184,3736 739.86,3742.28 2672.11,3749.47 228.56,3750.84 2182.91,3762.12 5771.42,3767.63 5255.51,3795.75 1063.38,3820.34 5528,3824 5752,3824 5008,3832 3292.05,3833.81 3469.18,3833.81 3356.72,3840.84 6093.08,3841.82 3074.16,3843.65 3176.78,3847.87 5184,3848 2638.38,3868.96 3126.17,3877.39 6164,3878 2318.75,3881.25 1010.5,3885.82 1160.92,3894.26 733.89,3895.03 1080,3896 5259.73,3896.96 5546.5,3899.77 2173.07,3902.69 144,3904 1976,3912 3126.17,3939.24 5184,3944 5646.31,3947.57 5978.74,3963.07 1284.63,3965.95 3286.43,3965.95 3175.38,3967.36 3072.76,3970.17 3359.53,3999.69 3692.7,3999.69 5262.54,3999.58 2667.9,4003.91 3464.96,4009.53 1056,4048 8340.81,4049.27 7224,4064 3744.71,4082.63 891.27,4083.89 7014.29,4091.74 2926.56,4106.53 6729.02,4106.98 2665.08,4107.93 3276.59,4127.61 2550,4131.25 675.22,4140.39 2031.09,4157.14 3467.77,4159.95 189.32,4165.71 3902.15,4172.6 2171.66,4189.47 6205.43,4204.17 2926.56,4204.93 3176.78,4214.77 3127.58,4216.18 5704,4216 7456,4216 3074.16,4217.58 8012.5,4225 831.24,4238.59 3701.13,4251.32 2401.14,4261.44 6943.05,4261.56 3299.08,4275.22 1048,4296 85.6,4297.46 8221.36,4346.75 5056,4368 5280,4368 3469.18,4375.03 2592,4376 5184,4376 2156.2,4394.71 2403.61,4400.33 4760,4400 3074.16,4405.96 3176.78,4405.96 3127.58,4407.36 3890.91,4411.58 3278,4415.8 3689.88,4415.8 3762.98,4420.01 4992,4424 2625.72,4446.72 5272,4448 5044.64,4467.7 2410.64,4469.21 2537.16,4512.79 3764.39,4518.42 2008.59,4521.23 1310.57,4524.51 2386.74,4525.45 2569.49,4533.88 5152,4536 3899.34,4538.1 77.19,4558.15 2007.19,4594.33 1911.6,4595.73 1711.98,4598.54 1810.38,4599.95 1610.76,4601.36 5216,4616 6120,4616 576.27,4642.53 118.88,4652.33 991.62,4652.11 1296,4656 6720,4656 5240,4680 2156.2,4727.87 6840,4736 1408,4768 1131.86,4785.46 3647.71,4785.51 3744.71,4796.76 2424,4800 6907.73,4804.5 6649.51,4819.95 6547.99,4830.98 3812.19,4838.93 7157.13,4850.85 3491.67,4851.58 3665.99,4852.99 1454.72,4854.39 3564.77,4875.48 8238.36,4890.78 1108.87,4895.81 1242.45,4903.59 1498.3,4903.59 2032,4904 2130.9,4905 2552,4912 2536,4976 1242.45,4982.32 5608,5032 5832,5040 1576,5064 5010.71,5070.96 1776,5072 2128,5072 5227.29,5132.33 8671.66,5174.57 1904,5176 1986.1,5184.75 8727.89,5197.07 8256.67,5223.18 5007.1,5229.78 1864.84,5254.86 5682.09,5255.05 3615.38,5277.53 1936,5280 5960,5312 2842.21,5321.11 2622.91,5330.95 2940.61,5337.97 6168,5344 1988.91,5364.68 3403.76,5394.82 4928,5408 5433.03,5417.48 8233.24,5478.68 5909.49,5486.06 6728,5488 1973.45,5498.23 6393.17,5500.5 3308.92,5524.94 3006.68,5529.16 1896,5568 3483.24,5606.47 2915.31,5607.88 1760,5624 1976,5624 8517.36,5642.54 8840.37,5665.2 3279.61,5665.99 5112,5672 1776,5688 3968,5696 7275.51,5699.69 1736,5744 1957.99,5748.46 3132.59,5757.47 6669.37,5793.25 4872,5808 4674.96,5809.36 5153.34,5815.15 5328,5824 2425,5825 6867.49,5830.03 5690.2,5849.08 96.35,5856.76 464.2,5863.66 264.18,5877.45 6647.3,5896.98 2838.3,5918.89 3354.75,5920.82 625.14,5934.93 7840,5944 1576,5952 5690.2,5959.44 7760,5968 1128,5992 3912,5992 1513.77,5993.06 1352,6000 1567.19,6001.49 1433.64,6015.55 2840,6016 3558.46,6029.78 3021.51,6035.17 105.54,6047.58 1856,6056 2008,6056 2184,6056 2328,6056 5072,6056 636.63,6068.27 4520,6072 7456,6112 4520,6136 5807.96,6139.17 1425.2,6143.48 4610.04,6149.64 119.33,6154.26 2052.17,6154.72 2496.11,6168.12 2808,6168 3647.71,6175.81 2192,6192 1532.04,6248.91 5088,6264 3368,6272 1425,6275 5473.61,6309.18 7456,6312 2215.92,6315.26 2716.82,6338.26 7015.53,6344.37 7840,6344 473.4,6357.96 84.38,6360.34 3976,6368 689.51,6369.45 2512.2,6375.04 3174.75,6399.63 2962.82,6414.13 1408,6416 3576,6416 5094.3,6422.91 837.5,6450 1012.5,6462.5 7181.7,6481.49 3936,6488 6978.65,6488.11 142.61,6494.2 6832.98,6510.18 7744,6520 2669.3,6530.06 1280,6544 74.49,6558.03 6216,6568 6360.68,6569.77 787.27,6584.1 6896,6584 1453.32,6596.13 5688.95,6598.19 455.79,6605.69 618.57,6605.59 2666.49,6632.68 263.4,6653.59 7188.32,6658.05 5887.59,6663.27 6781.5,6662.95 3968,6664 4224,6672 3013.4,6673.92 5547.52,6714.6 6536,6720 752,6728 5100.84,6744.68 6969.5,6753.75 7691.99,6756.18 5385.08,6774.08 7133.14,6783.85 4170.78,6788.56 624.78,6798.51 6695.68,6819.27 3024,6824 847.93,6824.5 241.31,6833.17 5536.89,6849.27 6798.1,6867.14 1536.87,6870 5787.31,6870.94 3217.6,6878.94 6084.46,6880.57 78.83,6883 6392,6888 4862.34,6894.97 7616.95,6901.84 6608.3,6902.81 3984,6912 1938.94,6920.52 5234.79,6921.1 396.19,6929.3 2525.91,6941.95 1601.86,6956.66 7304,6960 1169.53,6966.69 2458.44,6979.9 2603.23,6985.53 6756.75,6990.29 5738.75,6992.33 6896,7008 6329.13,7014.43 1912,7016 400.4,7023.48 4144.64,7040.13 1272.12,7043.63 2763.47,7058.64 2537.16,7071.28 7128.17,7071.1 6837.71,7078.41 6568.61,7085.88 80.99,7086.65 3047.71,7088.04 1723.22,7089.55 4957.09,7097.53 2485.15,7109.23 5519.17,7111.52 4440.88,7113.86 1198.9,7129.98 3400.3,7130.32 3597.1,7130.32 3494.48,7131.72 1450,7137.5 1376.55,7138.64 2672.11,7138.75 373.47,7140.81 1659.97,7145.78 3688,7160 3207.71,7166.87 3368,7184 6164.78,7184.44 3114.93,7203.42 4594.44,7211.88 2577.93,7238.56 63.66,7262.13 1555.94,7266.68 3411.54,7266.68 1774.8,7269.32 1203.23,7272.96 3309.08,7274.26 3204.53,7280.8 337.5,7282.5 5355.67,7290.29 6783.46,7291.35 4917.88,7303.36 1363.55,7305.46 5205.39,7306.62 5558.15,7352.51 6423.5,7391.38 1898.29,7394.94 1298.56,7396.45 387.5,7400 4496.42,7407.9 6232.79,7411.12 4783.93,7427.51 1427.83,7437.41 1604.03,7452.78 496.7,7460.28 5123.71,7466.71 2688,7512 2946.24,7564.7 6533.37,7565.03 7025.97,7575.66 2599.01,7584.38 8209.89,7587.58 7803.79,7591.99 8569.64,7603.03 65.83,7604.44 1387.38,7604.44 1725.35,7604.44 1064.58,7606.6 2689.44,7608.77 414.63,7610.94 3027.41,7610.94 4574.27,7610.94 712.5,7612.5 4931.74,7613.1 5577.35,7613.1 4240.64,7615.27 6706.09,7615.27 2331.97,7617.43 3309.05,7617.43 5265.38,7617.43 5910.99,7617.43 7000.73,7617.43 3930.83,7619.6 1957.17,7621.77 6292.29,7621.77 3621.02,7623.93
  other v2: 783.44,50 2480.5,50 2904.76,50 3329.03,50 3753.29,50 4177.56,50 4601.82,50 5026.08,50 5450.35,50 5874.61,50 6298.88,50 6723.14,50 7147.4,50 7571.67,50 7995.93,50 8420.2,50 8844.46,50 995.58,262.13 2268.37,262.13 2692.63,262.13 3965.42,262.13 4389.69,262.13 5238.22,262.13 5662.48,262.13 6935.27,262.13 7359.54,262.13 8632.33,262.13 783.44,474.26 3329.03,474.26 3753.29,474.26 5026.08,474.26 5450.35,474.26 6723.14,474.26 7147.4,474.26 7571.67,474.26 8420.2,474.26 5238.22,686.4 6935.27,686.4 8208.06,686.4 8632.33,686.4 4376,720 6080,744 3329.03,898.53 5026.08,898.53 5450.35,898.53 7571.67,898.53 8420.2,898.53 6912,1064 7359.54,1110.66 7783.8,1110.66 8208.06,1110.66 8632.33,1110.66 1868.75,1156.25 4944,1256 2056.24,1322.79 3329.03,1322.79 5874.61,1322.79 6298.88,1322.79 6723.14,1322.79 7147.4,1322.79 7571.67,1322.79 7995.93,1322.79 8420.2,1322.79 8844.46,1322.79 6552,1384 6960,1400 5720,1440 6104,1448 1419.84,1534.92 3116.9,1534.92 7359.54,1534.92 7783.8,1534.92 8208.06,1534.92 3832,1632 3753.29,1747.06 7995.93,1747.06 8844.46,1747.06 2592,1864 6704,1920 6528,1944 1844.1,1959.19 4813.95,1959.19 6086.74,1959.19 7359.54,1959.19 7783.8,1959.19 8208.06,1959.19 5668.75,1981.25 6412,2086 5987.5,2100 384,2160 3753.29,2171.32 5874.61,2171.32 7995.93,2171.32 7352,2232 6196,2318 4389.69,2383.45 5662.48,2383.45 6086.74,2383.45 7783.8,2383.45 8208.06,2383.45 7576,2472 7072,2496 6423.14,2545.58 5987.5,2581.25 2480.5,2595.58 5874.61,2595.58 7995.93,2595.58 4384,2672 7280,2696 6243.75,2762.5 6086.74,2807.72 6976,2808 8208.06,2807.72 8632.33,2807.72 5488,2824 5664,2952 6423.14,2969.85 5987.5,2993.75 8420.2,3019.85 8844.46,3019.85 6437.5,3193.75 6968,3200 3541.16,3231.98 5662.48,3231.98 5976,3272 5904,3392 6423.14,3394.11 6016,3416 8844.46,3444.11 6156,3646 6086.74,3656.25 5987.5,3806.25 571.31,3868.38 3753.29,3868.38 5874.61,3868.38 8844.46,3868.38 6396,3878 6088,4032 7816,4032 3920,4040 6225,4056.25 6608,4056 2175,4093.75 6450,4237.5 3753.29,4292.64 7147.4,4292.64 7571.67,4292.64 8844.46,4292.64 6384,4344 7784,4440 5238.22,4504.77 8632.33,4504.77 6040,4512 8844.46,4716.91 5696,4928 2552,5104 7147.4,5141.17 4389.69,5353.3 8448,5368 8784,5400 4008,5440 6968,5504 8000,5560 7816,5712 8208.06,5777.57 8632.33,5777.57 5032,5800 3870.5,5872 4046,5872 5450.35,5989.7 8420.2,5989.7 7760,6104 3975.1,6136 8632.33,6201.83 7147.4,6413.96 8420.2,6413.96 8844.46,6413.96 1912.5,6437.5 6461.32,6560 8216,6584 8632.33,6626.09 3753.29,6838.23 7571.67,6838.23 8420.2,6838.23 8844.46,6838.23 7359.54,7050.36 8632.33,7050.36 8248,7136 8431.25,7237.5 7147.4,7262.49 7493.75,7262.5 7995.93,7262.49 7140.79,7412.12 7565.05,7412.12 7989.31,7412.12 8413.58,7412.12
  other v3: 1873.76,2763.45 1324.37,2764.49 1619.12,2764.49
X10: R12.1 R13.1 U5.100 | length 298.5
  Top w8: R13.1@3038,3280 3105.51,3280 3128.59,3303.08 3128.81,3303.08 R12.1@3136,3306 3136.98,3304.82 3184.03,3304.82 3192,3296.85 U5.100@3322.54,3296.85
X11: C4.1 R12.2 U5.99 X2.1 | length 393
  Top w8: C4.1@3055,3475 3064.67,3475 X2.1@3064.67,3405.51 3123.99,3405.51 3137.5,3392 R12.2@3136.11,3367.99 ; R12.2@3136,3366 R12.2@3136.11,3367.99 ; U5.99@3322.54,3312.6 3224,3312.6 3168.61,3367.99 R12.2@3136.11,3367.99
X20: C3.1 R9.1 U5.39 X1.1 | length 556.1
  Top w8: U5.39@3952.46,2950.39 4064.61,2950.39 4119,2896 4142,2896 R9.1@4150,2904 ; R9.1@4150,2917.5 R9.1@4150,2904 ; X1.1@4250,2950 X1.1@4249.92,2950 ; C3.1@4350,2920 4350,2904 4342,2896 4258,2896 4250,2904 ; R9.1@4150,2904 4158,2896 4242,2896 4250,2904 ; X1.1@4237.5,2950.5 X1.1@4249.92,2950 ; X1.1@4237.5,2950.5 4231,2944 4244,2944 X1.1@4237.5,2950.5 ; X1.1@4249.92,2950 4249.92,2928.08 4250,2928 4250,2904
X21: C2.1 R9.2 U5.38 X1.2 | length 506.5
  Top w8: U5.38@3952.46,2934.65 4055.35,2934.65 4110,2880 4142,2880 R9.2@4150,2872 ; R9.2@4150,2857.5 R9.2@4150,2872 ; X1.2@4250,2827.95 4250,2872 ; C2.1@4350,2855 4350,2864.53 4336.24,2878.29 4256.29,2878.29 4250,2872 ; R9.2@4150,2872 4158,2880 4242,2880 4250,2872
pads on no net: CON2.17 CON2.19 CON5.6 CON6.8 CON7.12 CON10.14 CON11.3 CON20.14 CON20.15 CON20.16 CON20.23 CON20.24 CON20.30 CON20.31 CON20.32 CON20.33 CON20.34 CON20.35 CON20.36 CON20.38 CON20.41 CON20.42 CON20.43 CON20.44 CON20.45 CON20.46 CON20.49 CON20.50 CON20.51 CON20.52 CON20.53 CON20.54 CON20.55 CON20.56 CON20.57 CON20.58 CON20.59 CON20.60 CON20.61 CON20.62 CON20.63 CON20.64 CON20.65 CON20.66 CON21.5 CON21.6 CON21.23 CON21.24 CON24.15 CON24.16 CON29.8 CON29.9 CON29.E CON29.F CON32.4 CON32.6 CON32.8 CON32.9 CON32.10 CON33.1 CON33.4 CON33.6 CON33.7 CON33.8 CON33.9 CON34.1 CON34.4 CON34.6 CON34.9 CON36.1 CON36.4 CON36.6 CON36.9 CON37.1 CON37.4 CON37.6 CON37.9 CON38.4 CON38.10 CON38.11 H5.1 H6.1 K1.2 K1.4 K2.2 K2.4 K3.1 K3.3 K4.2 K4.4 K5.2 K5.4 K6.2 K6.4 RN8.7 RN8.8 SW5.2 SW5.3 SW9.2 SW9.3 U1.3 U1.6 U7.4 U7.5 U7.6 U7.11 U7.12 U7.13 U7.14 U8.3 U8.4 U8.5 U8.11 U8.14 U8.15 U8.20 U8.21 U8.22 U8.26 U8.27 U8.28 U8.33 U8.35 U8.40 U8.45 U8.46 U8.47 U9.1 U9.6 U9.7 U9.15 U9.16 U10.4 U10.5 U10.12 U10.13 U12.5 U13.7 U13.8 U13.9 U13.10

## Polygon pours and split planes (outlines as drawn)
CDAVS on Bottom "Bottom-CDAVS" (solid, remove dead copper, pour order 0): 50,5775 25,5750 25,4750 50,4725 1000,4725 1025,4750 1025,5112.5 1050,5137.5 1675,5137.5 1700,5162.5 1700,5887.5 1675,5912.5 1462.5,5912.5 1437.5,5887.5 1437.5,5800 1412.5,5775
VS on Bottom "Bottom-VS" (solid, remove dead copper, pour order 2): 25,5812.5 50,5787.5 1400,5787.5 1425,5812.5 1425,5900 1450,5925 1687.5,5925 1712.5,5900 1712.5,5150 1687.5,5125 1062.5,5125 1037.5,5100 1037.5,4737.5 1012.5,4712.5 50,4712.5 25,4687.5 25,50 50,25 8962.5,25 8987.5,50 8987.5,7625 8962.5,7650 50,7650 25,7625
VS on Top "Top-VS" (solid, remove dead copper, pour order 4): 25,5812.5 50,5787.5 1400,5787.5 1425,5812.5 1425,5900 1450,5925 1687.5,5925 1712.5,5900 1712.5,5150 1687.5,5125 1062.5,5125 1037.5,5100 1037.5,4737.5 1012.5,4712.5 50,4712.5 25,4687.5 25,50 50,25 8962.5,25 8987.5,50 8987.5,7625 8962.5,7650 50,7650 25,7625
CDAVS on Top "Top-CDAVS" (solid, remove dead copper, pour order 6): 50,5775 25,5750 25,4750 50,4725 1000,4725 1025,4750 1025,5112.5 1050,5137.5 1675,5137.5 1700,5162.5 1700,5887.5 1675,5912.5 1462.5,5912.5 1437.5,5887.5 1437.5,5800 1412.5,5775
CDAVS on 2-GND (split plane): 1695.92,5885.81 1695.92,5164.19 1673.31,5141.58 1050,5141.58 1048.44,5141.27 1047.12,5140.38 1022.12,5115.38 1021.23,5114.06 1020.92,5112.5 1020.92,4751.69 998.31,4729.08 51.69,4729.08 29.08,4751.69 29.08,5748.31 51.69,5770.92 1412.5,5770.92 1414.06,5771.23 1415.38,5772.12 1440.38,5797.12 1441.27,5798.44 1441.58,5800 1441.58,5885.81 1464.19,5908.42 1673.31,5908.42
VS on 2-GND (split plane): 8983.42,7623.31 8983.42,51.69 8960.81,29.08 51.69,29.08 29.08,51.69 29.08,4685.81 51.69,4708.42 1012.5,4708.42 1014.06,4708.73 1015.38,4709.62 1040.38,4734.62 1041.27,4735.94 1041.58,4737.5 1041.58,5098.31 1064.19,5120.92 1687.5,5120.92 1689.06,5121.23 1690.38,5122.12 1715.38,5147.12 1716.27,5148.44 1716.58,5150 1716.58,5900 1716.27,5901.56 1715.38,5902.88 1690.38,5927.88 1689.06,5928.77 1687.5,5929.08 1450,5929.08 1448.44,5928.77 1447.12,5927.88 1422.12,5902.88 1421.23,5901.56 1420.92,5900 1420.92,5814.19 1398.31,5791.58 51.69,5791.58 29.08,5814.19 29.08,7623.31 51.69,7645.92 8960.81,7645.92
5VIN on 3-POWER (split plane): 1858.42,6966.58 741.58,6966.58 741.58,7208.42 875,7208.42 876.56,7208.73 877.88,7209.62 878.77,7210.94 879.08,7212.5 879.08,7658.42 1858.42,7658.42
VD12 on 3-POWER (split plane): 3183.42,6235.81 3183.42,3687.5 3183.73,3685.94 3184.62,3684.62 3209.62,3659.62 3210.94,3658.73 3212.5,3658.42 3873.31,3658.42 3895.92,3635.81 3895.92,2864.19 3873.31,2841.58 3325,2841.58 3323.44,2841.27 3322.12,2840.38 3297.12,2815.38 3296.23,2814.06 3295.92,2812.5 3295.92,2714.19 3273.31,2691.58 3151.69,2691.58 3129.08,2714.19 3129.08,3223.31 3151.69,3245.92 3337.5,3245.92 3339.06,3246.23 3340.38,3247.12 3365.38,3272.12 3366.27,3273.44 3366.58,3275 3366.58,3412.5 3366.27,3414.06 3365.38,3415.38 3340.38,3440.38 3339.06,3441.27 3337.5,3441.58 2701.69,3441.58 2679.08,3464.19 2679.08,5287.5 2678.77,5289.06 2677.88,5290.38 2652.88,5315.38 2651.56,5316.27 2650,5316.58 1514.19,5316.58 1491.58,5339.19 1491.58,6235.81 1514.19,6258.42 3160.81,6258.42
VIN on 3-POWER (split plane): 858.42,7635.81 858.42,7264.19 835.81,7241.58 737.5,7241.58 735.94,7241.27 734.62,7240.38 709.62,7215.38 708.73,7214.06 708.42,7212.5 708.42,6975 708.73,6973.44 709.62,6972.12 734.62,6947.12 735.94,6946.23 737.5,6945.92 1260.81,6945.92 1283.42,6923.31 1283.42,6787.5 1283.73,6785.94 1284.62,6784.62 1309.62,6759.62 1310.94,6758.73 1312.5,6758.42 3298.31,6758.42 3320.92,6735.81 3320.92,6539.19 3298.31,6516.58 51.69,6516.58 29.08,6539.19 29.08,7635.81 51.69,7658.42 835.81,7658.42
VD33 on 3-POWER (split plane): 8979.92,7635.81 8979.92,51.69 8957.31,29.08 51.69,29.08 29.08,51.69 29.08,6473.31 51.69,6495.92 3312.5,6495.92 3314.06,6496.23 3315.38,6497.12 3340.38,6522.12 3341.27,6523.44 3341.58,6525 3341.58,6750 3341.27,6751.56 3340.38,6752.88 3315.38,6777.88 3314.06,6778.77 3312.5,6779.08 1326.69,6779.08 1304.08,6801.69 1304.08,6923.31 1326.69,6945.92 1850,6945.92 1851.56,6946.23 1852.88,6947.12 1865.38,6959.62 1877.88,6972.12 1878.77,6973.44 1879.08,6975 1879.08,7635.81 1901.69,7658.42 8957.31,7658.42

## Keep-outs
Keep-Out Layer:
  the board outline again, w10

## Other copper
Top:
  region net N16071977: 462.5,7100 437.5,7075 437.5,6900 462.5,6875 800,6875 825,6900 825,6975 800,7000 750,7000 725,7025 725,7075 700,7100 462.5,7100
  region net VS: 1700,4100 1800,4100 1800,4000 1700,4000 1700,4100
  region net CDAVS: 1187.5,5575 1312.5,5575 1312.5,5450 1187.5,5450 1187.5,5575
Bottom:
  region net VS: 1700,4100 1800,4100 1800,4000 1700,4000 1700,4100
  region net CDAVS: 1187.5,5568 1312.5,5568 1312.5,5450 1187.5,5450 1187.5,5568
2-GND (plane layer: these items are gaps in the copper):
  region: 1176,5592 1328,5592 1328,5432 1176,5432 1176,5592
  region: 9012.5,0 0,0 0,7677.17 9012.5,7677.17 hole: 1675,5912.5 1462.5,5912.5 1437.5,5887.5 1437.5,5800 1412.5,5775 50,5775 25,5750 25,4750 50,4725 1000,4725 1025,4750 1025,5112.5 1050,5137.5 1675,5137.5 1700,5162.5 1700,5887.5 hole: 8962.5,7650 50,7650 25,7625 25,5812.5 50,5787.5 1400,5787.5 1425,5812.5 1425,5900 1450,5925 1687.5,5925 1712.5,5900 1712.5,5150 1687.5,5125 1062.5,5125 1037.5,5100 1037.5,4737.5 1012.5,4712.5 50,4712.5 25,4687.5 25,50 50,25 8962.5,25 8987.5,50 8987.5,7625
  lines w8: 25,50 25,4687.5 50,4712.5 1012.5,4712.5 1037.5,4737.5 1037.5,5100 1062.5,5125 1687.5,5125 1712.5,5150 1712.5,5900 1687.5,5925 1450,5925 1425,5900 1425,5812.5 1400,5787.5 50,5787.5 25,5812.5 25,7625 50,7650 8962.5,7650 8987.5,7625 8987.5,50 8962.5,25 50,25 25,50 ; 25,4750 25,5750 50,5775 1412.5,5775 1437.5,5800 1437.5,5887.5 1462.5,5912.5 1675,5912.5 1700,5887.5 1700,5162.5 1675,5137.5 1050,5137.5 1025,5112.5 1025,4750 1000,4725 50,4725 25,4750
3-POWER (plane layer: these items are gaps in the copper):
  region: 9012.5,0 0,0 0,7677.17 9012.5,7677.17 hole: 1862.5,7662.5 875,7662.5 875,7212.5 737.5,7212.5 737.5,6962.5 1862.5,6962.5 hole: 837.5,7662.5 50,7662.5 25,7637.5 25,6537.5 50,6512.5 3300,6512.5 3325,6537.5 3325,6737.5 3300,6762.5 1312.5,6762.5 1287.5,6787.5 1287.5,6925 1262.5,6950 737.5,6950 712.5,6975 712.5,7212.5 737.5,7237.5 837.5,7237.5 862.5,7262.5 862.5,7637.5 hole: 8959,7662.5 1900,7662.5 1875,7637.5 1875,6975 1850,6950 1325,6950 1300,6925 1300,6800 1325,6775 3312.5,6775 3337.5,6750 3337.5,6525 3312.5,6500 50,6500 25,6475 25,50 50,25 8959,25 8984,50 8984,7637.5
  lines w8: 25,50 25,6475 50,6500 3312.5,6500 3337.5,6525 3337.5,6750 3312.5,6775 1325,6775 1300,6800 1300,6925 1325,6950 1850,6950 1875,6975 1875,7637.5 1900,7662.5 8959,7662.5 8984,7637.5 8984,50 8959,25 50,25 25,50 ; 25,6537.5 50,6512.5 3300,6512.5 3325,6537.5 3325,6737.5 3300,6762.5 1312.5,6762.5 1287.5,6787.5 1287.5,6925 1262.5,6950 737.5,6950 712.5,6975 712.5,7212.5 737.5,7237.5 837.5,7237.5 862.5,7262.5 862.5,7637.5 837.5,7662.5 50,7662.5 25,7637.5 25,6537.5 ; 737.5,6962.5 1862.5,6962.5 1862.5,7662.5 875,7662.5 875,7212.5 737.5,7212.5 737.5,6962.5 ; 1487.5,5337.5 1512.5,5312.5 2650,5312.5 2675,5287.5 2675,3462.5 2700,3437.5 3337.5,3437.5 3362.5,3412.5 3362.5,3275 3337.5,3250 3150,3250 3125,3225 3125,2712.5 3150,2687.5 3275,2687.5 3300,2712.5 3300,2812.5 3325,2837.5 3875,2837.5 3900,2862.5 3900,3637.5 3875,3662.5 3212.5,3662.5 3187.5,3687.5 3187.5,6237.5 3162.5,6262.5 1512.5,6262.5 1487.5,6237.5 1487.5,5337.5